# EAGLE board RFID Reader PCB (EAGLE 5.02)
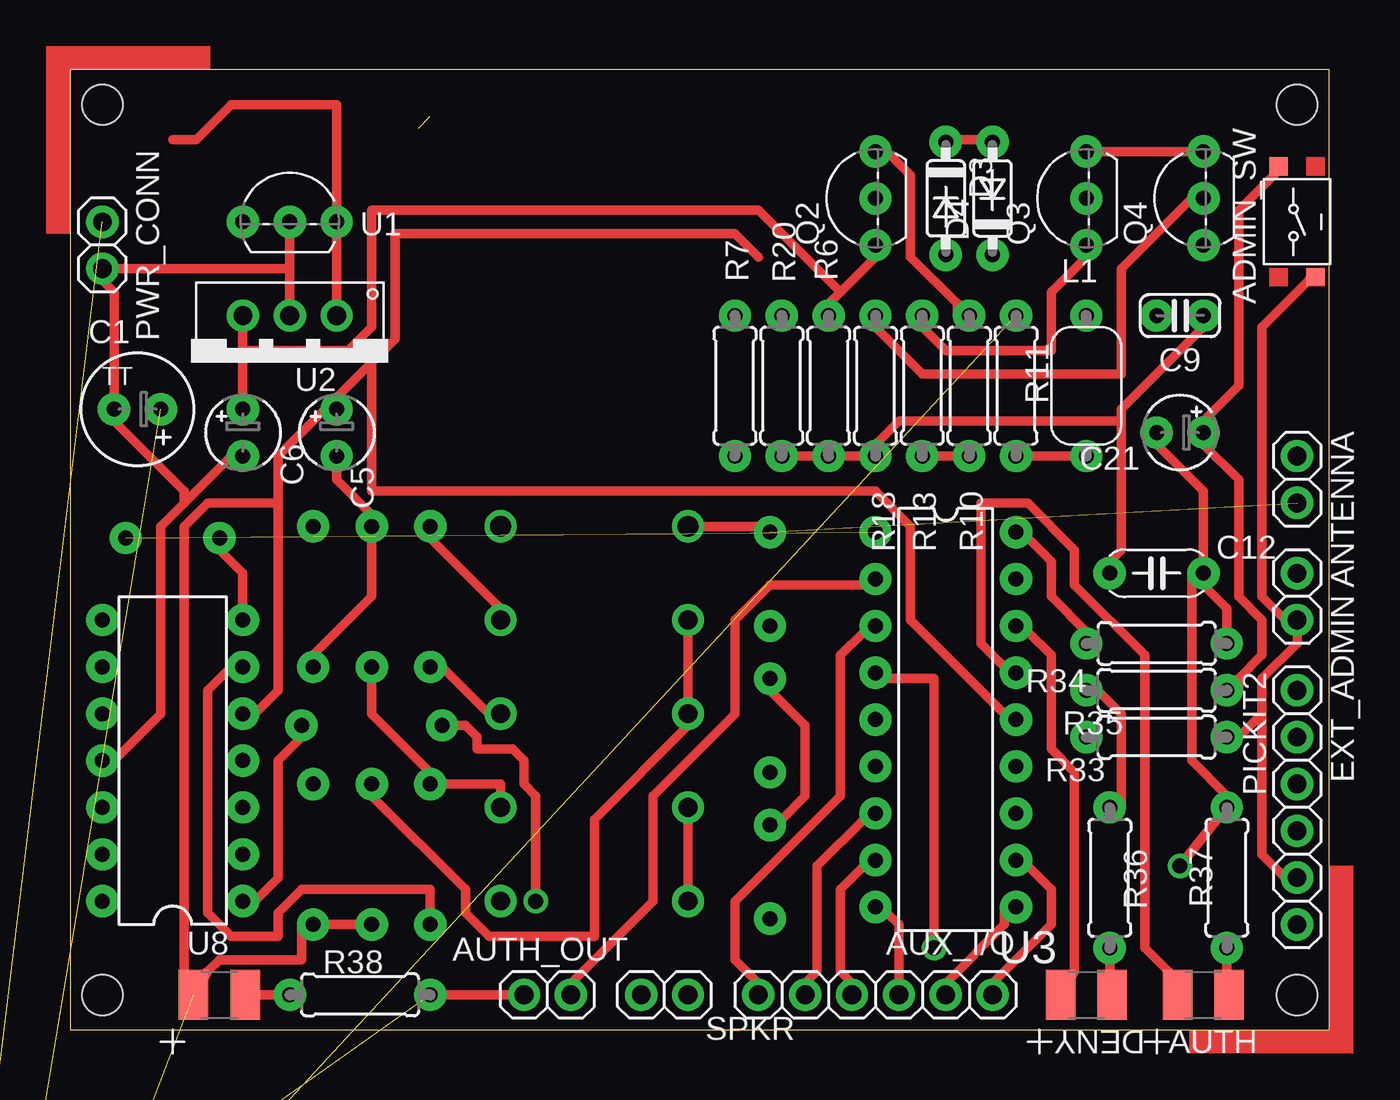
[diagram p0: board, top side]
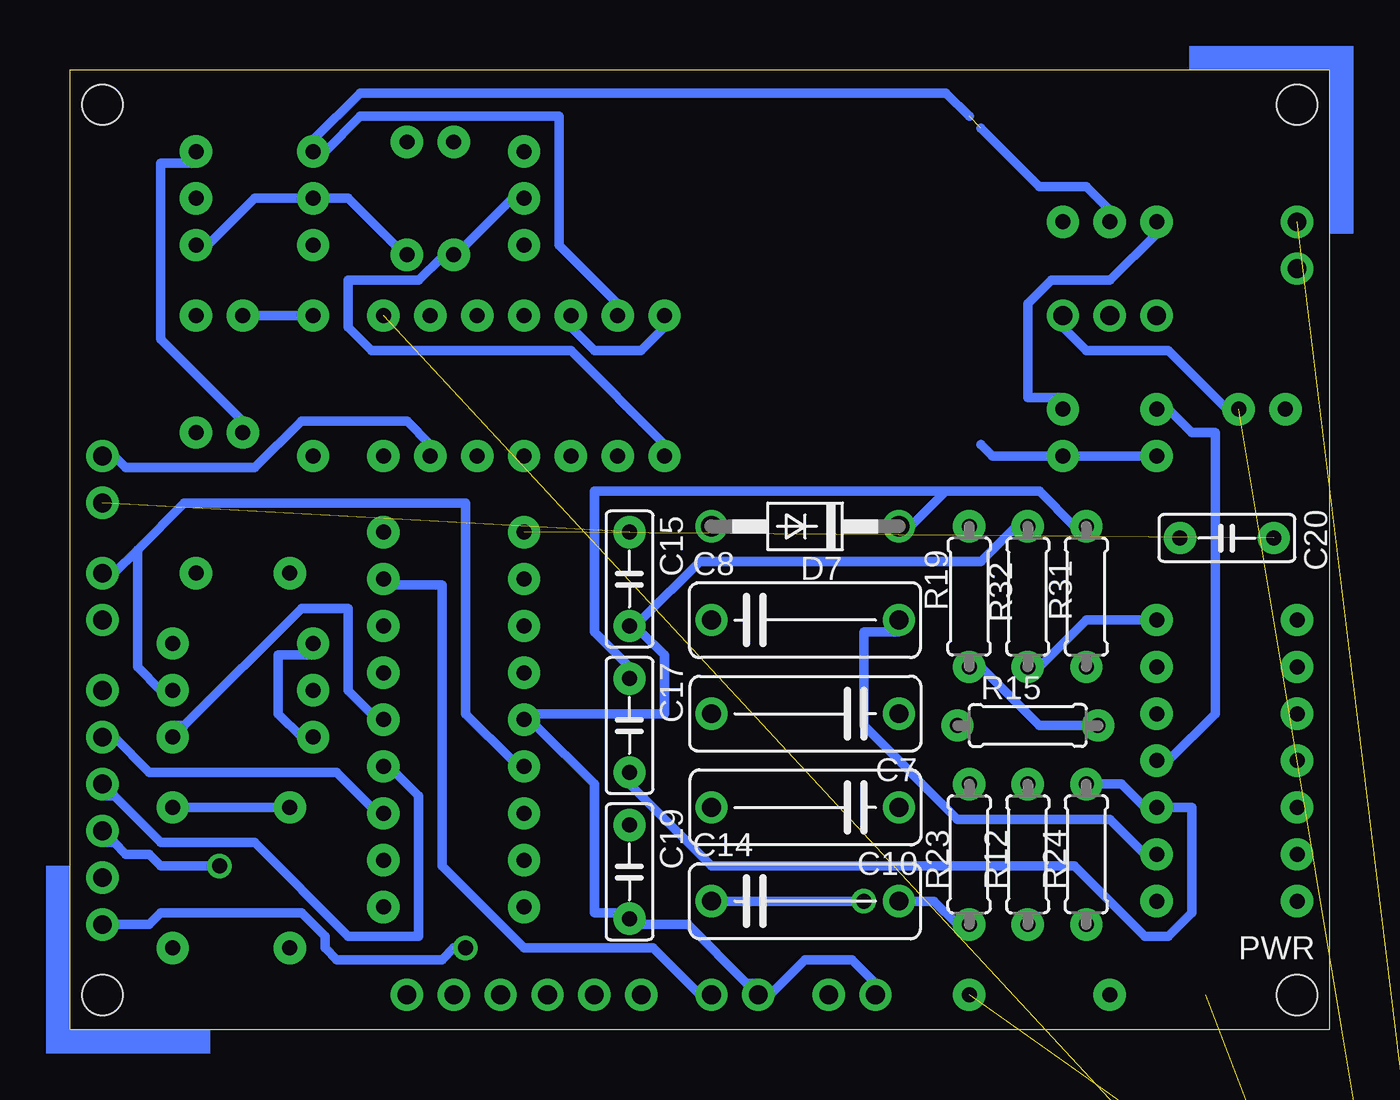
[diagram p1: board, bottom side, seen from below]

Size 68.25 x 52.06 mm. Coordinates in mm from the lower left corner, seen from the top.
Outline: 0,0 68.25,0 68.25,52.06 0,52.06 0,0
Copper layers (1*16): Top 0.035mm / dielectric 1.5mm / Bottom 0.035mm
Design rules "etched pcb *": minimum track width 10mil, minimum drill 32mil, track to track 10mil, track to pad 10mil, pad to pad 10mil, via to via 10mil, smd to smd 8mil, copper to edge 5mil, drill to drill 10mil, minimum pad ring 10mil, minimum via ring 10mil, stop-mask expansion 4mil, vias tented up to drill 0mil, thermal gap 10mil
Net classes: 0 default: width 0.508 mm
Holes 2.2 mm at 1.74,50.16 66.51,50.16 66.51,1.9 1.74,1.9

## Footprints (pad centres in the part's own frame; a part is rotated, then mirrored left to right if it is on the bottom)
PUSH_SW = smd 1 x 1: 1 -3,-1; 2 3,1
1X02 = drill 1.016 pad 1.75 round: 1 -1.27,0; 2 1.27,0
C1210 = smd 1.6 x 2.7: A -1.4,0; C 1.4,0
1X06 = drill 1.016 pad 1.75 round: 1 -6.35,0; 2 -3.81,0; 3 -1.27,0; 4 1.27,0; 5 3.81,0; 6 6.35,0
TT2D6 = drill 0.813 pad 1.75 round: + -1.27,0; - 1.27,0
TT2D4 = drill 0.813 pad 1.75 round: + -1.27,0; - 1.27,0
C102-040X125 = drill 1.016 pad 1.75 round: 1 -5.08,0; 2 5.08,0
C025-024X044 = drill 0.813 pad 1.75 round: 1 -1.27,0; 2 1.27,0
C050-025X050 = drill 0.813 pad 1.75 round: 1 -2.54,0; 2 2.54,0
C050-025X075 = drill 0.813 pad 1.75 round: 1 -2.54,0; 2 2.54,0
DO35-4 = drill 0.813 pad 1.75 round: A 3.06,0; C -3.06,0
DO41-10 = drill 1.118 pad 1.75 round: A 5.08,0; C -5.08,0
0208/7 = drill 0.813 pad 1.75 round: 1 -3.81,0; 2 3.81,0
TO92-CBE = drill 0.813 pad 1.75 round: B 0,0; C -2.54,0; E 2.54,0
TO92-EBC = drill 0.813 pad 1.75 round: B 0,-1.27; C 2.54,-1.27; E -2.54,-1.27
0207/7 = drill 0.813 pad 1.75 round: 1 -3.81,0; 2 3.81,0
TO92- = drill 0.813 pad 1.75 round: 1 2.54,0; 2 0,0; 3 -2.54,0
TO220V = drill 1.016 pad 1.75 round: 1 -2.54,-2.54; 2 0,-2.54; 3 2.54,-2.54
DIL18 = drill 0.813 pad 1.75 round: 1 -10.16,-3.81; 2 -7.62,-3.81; 3 -5.08,-3.81; 4 -2.54,-3.81; 5 0,-3.81; 6 2.54,-3.81; 7 5.08,-3.81; 8 7.62,-3.81; 9 10.16,-3.81; 10 10.16,3.81; 11 7.62,3.81; 12 5.08,3.81; 13 2.54,3.81; 14 0,3.81; 15 -2.54,3.81; 16 -5.08,3.81; 17 -7.62,3.81; 18 -10.16,3.81
DIL14 = drill 0.813 pad 1.75 round: 1 -7.62,-3.81; 2 -5.08,-3.81; 3 -2.54,-3.81; 4 0,-3.81; 5 2.54,-3.81; 6 5.08,-3.81; 7 7.62,-3.81; 8 7.62,3.81; 9 5.08,3.81; 10 2.54,3.81; 11 0,3.81; 12 -2.54,3.81; 13 -5.08,3.81; 14 -7.62,3.81
DIL08 = drill 0.813 pad 1.75 round: 1 -3.81,-3.81; 2 -1.27,-3.81; 3 1.27,-3.81; 4 3.81,-3.81; 5 3.81,3.81; 6 1.27,3.81; 7 -1.27,3.81; 8 -3.81,3.81

## Placement (x,y rotation side)
ADMIN_SW  SWITCH  [PUSH_SW]  66.51,43.81 270 top
ANTENNA  PINHD-1X2  [1X02]  66.51,29.84 270 top
AUTH  LED  [C1210]  61.43,1.9 0 top
AUTH_OUT  PINHD-1X2  [1X02]  25.87,1.9 180 top
AUX_I/O  PINHD-1X6  [1X06]  43.65,1.9 0 top
C1  100uF 25V  [TT2D6]  3.65,33.65 180 top
C5  10uF 16V  [TT2D4]  14.44,32.38 270 top
C6  10uF 16V  [TT2D4]  9.36,32.38 270 top
C7  1000pF  [C102-040X125]  28.41,17.14 180 bottom
C8  1000pF  [C102-040X125]  28.41,22.22 0 bottom
C9  1800pF  [C025-024X044]  60.16,38.73 0 top
C10  1000pF  [C102-040X125]  28.41,12.06 180 bottom
C12  6200pF  [C050-025X050]  58.89,24.76 0 top
C14  1000pF  [C102-040X125]  28.41,6.98 0 bottom
C15  1000pF  [C050-025X075]  37.94,24.44 270 bottom
C17  1000pF  [C050-025X075]  37.94,16.5 270 bottom
C19  .0022uF  [C050-025X075]  37.94,8.57 270 bottom
C20  1000pF  [C050-025X075]  5.55,26.67 180 bottom
C21  10uF 16V  [TT2D4]  60.16,32.38 180 top
D3  1N4148  [DO35-4]  47.46,45.08 270 top
D4  1N4148  [DO35-4]  50,45.08 90 top
D7  1N4936  [DO41-10]  28.41,27.3 180 bottom
DENY  LED  [C1210]  55.08,1.9 0 top
EXT_ADMIN  PINHD-1X2  [1X02]  66.51,23.49 270 top
EXT_PWR_SW  PINHD-1X2  [1X02]  -3.34,-8.26 0 top  (outside the outline)
L1  1000uH  [0208/7]  55.08,34.92 90 top
PICKIT2  PINHD-1X6  [1X06]  66.51,12.06 270 top
PWR  LED  [C1210]  8.09,1.9 0 top
PWR_CONN  PINHD-1X2  [1X02]  1.74,42.54 270 top
Q2  2N2222  [TO92-CBE]  43.65,45.08 90 top
Q3  2N2907  [TO92-EBC]  53.81,45.08 90 top
Q4  2N2907  [TO92-EBC]  60.16,45.08 90 top
R6  22k  [0207/7]  41.11,34.92 90 top
R7  470  [0207/7]  36.03,34.92 270 top
R10  10  [0207/7]  48.73,34.92 270 top
R11  82  [0207/7]  51.27,34.92 270 top
R12  1.82k  [0207/7]  16.34,9.52 270 bottom
R13  10  [0207/7]  46.19,34.92 90 top
R15  2.67k  [0207/7]  16.34,16.5 0 bottom
R18  100  [0207/7]  43.65,34.92 270 top
R19  47.5K  [0207/7]  19.52,23.49 90 bottom
R20  12k  [0207/7]  38.57,34.92 270 top
R23  82.5k  [0207/7]  19.52,9.52 270 bottom
R24  1M  [0207/7]  13.17,9.52 90 bottom
R31  390k  [0207/7]  13.17,23.49 270 bottom
R32  100k  [0207/7]  16.34,23.49 270 bottom
R33  10k  [0207/7]  58.89,15.87 0 top
R34  3.6k  [0207/7]  58.89,20.95 180 top
R35  4.7k  [0207/7]  58.89,18.41 0 top
R36  220  [0207/7]  56.35,8.25 270 top
R37  220  [0207/7]  62.7,8.25 270 top
R38  220  [0207/7]  15.71,1.9 180 top
SPKR  PINHD-1X2  [1X02]  32.22,1.9 180 top
U1  LM78L05ACZ  [TO92-]  11.9,43.81 0 top
U2  LM78M12CT  [TO220V]  11.9,36.19 180 top
U3  PIC16F88  [DIL18]  47.46,16.82 270 top
U8  TL084P  [DIL14]  5.55,14.6 90 top
U9  PIC10F222  [DIL08]  -0.8,-17.15 0 top  (outside the outline)

## Library data of the parts
ADMIN_SW ANTENNA AUTH AUTH_OUT AUX_I/O C1 C5-C10 C12 C14 C15 C17 C19-C21 D3 D4 D7 DENY EXT_ADMIN EXT_PWR_SW L1 PICKIT2 PWR PWR_CONN Q2-Q4 R6 R7 R10-R13 R15 R18-R20 R23 R24 R31-R38 SPKR U1-U3 U8 U9 = RFID Reader Part Library

## Nets
+5V: ADMIN_SW.2 C5.+ EXT_ADMIN.2 PICKIT2.5 PWR.A R12.2 R24.1 R33.2 U1.3 U3.14 U8.5 U9.2
+12V: C6.+ Q2.C R6.2 R7.1 U2.3 U8.4
GND: AUTH_OUT.2 C1.- C5.- C6.- C12.2 C15.2 C19.2 C21.- PICKIT2.4 PWR_CONN.2 Q3.C Q4.C R20.1 R31.2 R32.1 R34.1 R35.1 R36.1 R37.1 R38.1 SPKR.2 U1.2 U2.2 U3.5 U8.11 U9.7
N$1: R11.1 U9.5
N$2: EXT_PWR_SW.1 PWR_CONN.1
N$5: L1.1 R11.2
N$7: C9.1 L1.2
N$8: C9.2 C12.1 R6.1 R18.2 R20.2
N$9: ANTENNA.2 C15.1 D7.A
N$10: Q2.E R10.1
N$11: ANTENNA.1 R10.2 R13.1
N$12: Q3.E R13.2
N$13: D3.A Q2.B R7.2
N$14: D3.C D4.A
N$15: D4.C Q3.B Q4.E
N$16: Q4.B R18.1
N$17: C14.2 R23.2 U8.6
N$18: C17.1 C19.1 D7.C R31.1
N$19: DENY.C R36.2
N$20: C17.2 R24.2 U8.3
N$21: C10.2 C14.1 R15.1
N$22: C10.1 C20.2 R23.1 R32.2 U8.7
N$23: C8.2 R19.2 U8.2
N$24: C7.1 R15.2 R19.1 U8.1
N$25: C7.2 C8.1 R12.1
N$26: AUTH.C R37.2
N$27: AUTH.A U3.15
N$28: R33.1 R34.2 U3.18
N$29: PWR.C R38.2
N$30: DENY.A U3.16
N$31: PICKIT2.2 U3.12
N$32: ADMIN_SW.1 C21.+ EXT_ADMIN.1 R35.2 U3.6
N$33: PICKIT2.6 U3.4
N$34: PICKIT2.3 U3.13
N$35: AUX_I/O.1 U3.3
N$36: AUX_I/O.2 U3.7
N$37: AUX_I/O.3 U3.8
N$38: AUX_I/O.4 U3.9
N$39: AUX_I/O.5 U3.10
N$40: AUX_I/O.6 U3.11
N$41: C20.1 U3.1
N$43: SPKR.1 U3.17
N$44: AUTH_OUT.1 U3.2
SUPPLY: C1.+ EXT_PWR_SW.2 U1.1 U2.1

## Tracks (layer width: path | path; a pad name or v marks a point on that pad's centre or on a via)
+5V  (1 unrouted)
  Top 0.508: ADMIN_SW.2 67.14,40.63 64.61,38.09 64.61,23.49 65.88,22.22 EXT_ADMIN.2 66.51,20.95 64.61,19.04 64.61,17.14 | 64.61,17.14 63.34,15.87 R33.2 | 64.61,17.14 64.61,9.52 65.88,8.25 PICKIT2.5 | R12.2 R24.1 12.54,5.71 12.54,3.8 8.09,3.8 7.46,3.17 PWR.A 6.19,3.17 6.19,27.3 7.46,28.57 11.26,28.57 | 11.26,28.57 11.26,31.11 13.8,33.65 C5.+ 14.44,34.28 16.34,36.19 | 11.26,28.57 11.26,18.41 9.99,17.14 U8.5 | 37.3,41.91 36.03,43.17 17.61,43.17 17.61,37.46 16.34,36.19 | 16.34,36.19 16.34,29.21 43.65,29.21 45.55,27.3 45.55,22.22 50.64,17.14 U3.14
  Bottom 0.508: U3.14 51.91,17.14 53.18,18.41 53.18,22.86 55.72,22.86 62.07,16.5 62.7,16.5 R33.2 | U1.3 9.36,43.17 11.9,40.63 15.07,40.63 16.34,39.36 16.34,34.28 14.44,34.28 C5.+
+12V
  Top 0.508: 41.75,40 41.11,39.36 R6.2 | 41.75,40 43.65,41.91 Q2.C | 9.36,36.83 U2.3 | C6.+ 9.36,36.83 | 41.75,40 37.3,44.44 16.34,44.44 16.34,38.09 15.07,36.83 9.36,36.83
  Bottom 0.508: R7.1 36.03,38.09 37.3,36.83 39.84,36.83 41.11,38.09 R6.2 | U8.4 8.72,14.6 6.19,17.14 6.19,32.38 7.46,32.38 8.72,33.65 C6.+
GND  (via drill 0.81)  (2 unrouted)
  Top 0.508: R35.1 55.72,18.41 56.98,17.14 56.98,12.06 R36.1 | C12.2 61.43,24.13 62.7,22.86 R34.1 | C21.- 58.89,31.75 61.43,29.21 C12.2 | C12.2 60.8,24.76 60.8,14.6 62.7,12.7 R37.1 v60.16,8.89 | Q4.C Q3.C | AUTH_OUT.2 R38.1 | 11.9,41.27 U2.2 | 11.9,41.27 U1.2 | R31.2 13.17,20.32 16.34,23.49 R32.1 16.34,27.93 14.44,29.84 C5.- | 6.19,28.57 8.72,31.11 C6.- | 6.19,28.57 4.92,27.3 4.92,17.14 2.38,14.6 U8.11 | 6.19,28.57 6.19,29.21 2.38,33.02 C1.- 2.38,40 1.74,40.63 PWR_CONN.2 11.9,41.27
  Bottom 0.508: R36.1 R37.1 | R20.1 38.57,39.36 41.75,42.54 41.75,49.52 52.54,49.52 54.45,47.62 Q3.C 55.08,48.25 52.54,50.8 20.79,50.8 19.52,49.52 | C21.- 58.89,33.02 63.34,37.46 63.34,46.98 61.43,46.98 Q4.C | AUTH_OUT.2 24.6,2.54 25.87,3.8 28.41,3.8 30.31,1.9 SPKR.2 30.95,2.54 31.58,2.54 34.76,5.71 37.3,5.71 C19.2 38.57,6.35 39.84,6.35 39.84,13.33 43.02,16.5 U3.5 43.02,17.14 36.03,17.14 36.03,20.32 37.3,21.59 C15.2 37.3,22.22 34.12,25.39 18.88,25.39 16.98,27.3 R32.1 | 18.88,48.89 15.71,45.72 13.17,45.72 11.9,44.44 U1.2 | C6.- C5.- 18.25,31.11 18.88,31.75 | v60.16,8.89 63.34,8.89 63.97,9.52 65.24,9.52 65.88,10.16 66.51,10.16 PICKIT2.4
N$1  (1 unrouted)
N$2  (1 unrouted)
N$5
  Top 0.508: R11.2 L1.1
N$7
  Bottom 0.508: L1.2 C9.1
N$8
  Top 0.508: R20.2 R6.1 R18.2 43.65,31.75 44.92,33.02 56.98,33.02 | 56.98,33.02 56.98,33.65 61.43,38.09 C9.2 | 56.98,33.02 56.98,26.03 56.35,25.39 C12.1
N$9  (1 unrouted)
  Top 0.508: C15.1 37.3,27.3 D7.A
N$10
  Top 0.508: Q2.E 44.29,47.62 45.55,46.35 45.55,41.91 48.1,39.36 48.1,38.73 R10.1
N$11
  Top 0.508: R13.1 R10.2
  Bottom 0.508: ANTENNA.1 65.88,31.11 65.24,30.47 58.26,30.47 55.72,33.02 50,33.02 48.73,31.75 R10.2
N$12
  Top 0.508: R13.2 46.19,38.09 47.46,36.83 53.18,36.83 53.18,40 55.08,41.91 Q3.E
N$13
  Bottom 0.508: R7.2 36.03,31.75 41.11,36.83 51.91,36.83 53.18,38.09 53.18,40.63 49.37,40.63 48.1,41.91 D3.A 46.83,42.54 44.29,45.08 Q2.B
N$14
  Top 0.508: D3.C 48.1,48.25 49.37,48.25 D4.A
N$15
  Bottom 0.508: D4.C 50.64,42.54 53.18,45.08 Q3.B 58.26,45.08 60.8,42.54 Q4.E
N$16
  Top 0.508: R18.1 43.65,38.09 46.19,35.56 56.98,35.56 56.98,41.27 60.8,45.08 Q4.B
N$17
  Top 0.508: U8.6 8.72,19.68 7.46,18.41 7.46,6.35 8.72,5.07 11.26,5.07 11.26,6.35 12.54,7.61 19.52,7.61 R23.2
  Bottom 0.508: R23.2 20.15,5.71 21.43,6.98 C14.2
N$18
  Top 0.508: C19.1 38.57,11.43 39.84,12.7 39.84,16.5 37.94,18.41 C17.1
  Bottom 0.508: 20.79,29.21 15.71,29.21 13.8,27.3 R31.1 | 20.79,29.21 22.7,27.3 D7.C | 20.79,29.21 39.84,29.21 39.84,21.59 37.94,19.68 C17.1
N$19
  Top 0.508: DENY.C 56.35,3.17 R36.2
N$20
  Bottom 0.508: R24.2 11.26,13.33 9.99,12.06 U8.3 7.46,12.06 7.46,6.35 8.72,5.07 9.99,5.07 13.8,8.89 33.49,8.89 37.94,13.33 C17.2
N$21  (via drill 0.81)
  Top 0.508: C14.1 C10.2 | v25.23,6.98 25.23,12.7 24.6,13.33 24.6,14.6 23.96,15.24 22.06,15.24 22.06,15.87 21.43,16.5 R15.1
  Bottom 0.508: v25.23,6.98 C14.1
N$22
  Top 0.508: C10.1 23.33,13.33 R23.1 19.52,13.96 16.34,17.14 R32.2 | C20.2 8.09,26.03 9.36,24.76 U8.7
  Bottom 0.508: R32.2 15.71,19.68 13.17,22.22 U8.7
N$23
  Top 0.508: R19.2 19.52,26.67 23.33,22.86 C8.2
  Bottom 0.508: U8.2 9.99,9.52 11.9,11.43 20.15,11.43 25.23,16.5 25.23,21.59 23.33,21.59 C8.2
N$24
  Top 0.508: R19.1 20.15,19.68 22.7,17.14 C7.1 | U8.1 9.99,6.98 11.26,8.25 11.26,14.6 12.54,15.87 R15.2
  Bottom 0.508: R19.1 18.88,19.68 15.71,16.5 R15.2
N$25
  Top 0.508: R12.1 16.34,12.7 21.43,7.61 21.43,6.35 22.7,5.07 28.41,5.07 28.41,11.43 33.49,16.5 C7.2 C8.1
N$26
  Top 0.508: AUTH.C 62.7,3.17 R37.2
N$27
  Top 0.508: AUTH.A 59.53,3.17 58.26,4.44 58.26,20.32 54.45,24.13 54.45,26.03 51.91,28.57 49.37,28.57 49.37,20.95 50.64,19.68 U3.15
N$28
  Top 0.508: U3.18 51.91,26.67 53.18,25.39 53.18,23.49 55.08,21.59 R34.2
  Bottom 0.508: R33.1 55.72,15.87 56.98,17.14 56.98,20.32 55.08,20.32 R34.2
N$29
  Top 0.508: PWR.C R38.2
N$30
  Top 0.508: DENY.A 54.45,3.17 54.45,13.96 53.18,15.24 53.18,20.32 51.91,21.59 U3.16
N$31
  Bottom 0.508: U3.12 51.91,12.06 53.81,13.96 63.97,13.96 65.88,15.87 PICKIT2.2
N$32
  Top 0.508: ADMIN_SW.1 65.24,46.35 63.34,44.44 63.34,34.92 61.43,33.02 C21.+ 61.43,31.75 63.34,29.84 63.34,23.49 64.61,22.22 64.61,20.32 63.34,19.04 63.34,18.41 R35.2
  Bottom 0.508: 64.61,26.03 65.88,24.76 EXT_ADMIN.1 | 64.61,26.03 62.07,28.57 46.83,28.57 46.83,17.14 44.29,14.6 U3.6 | 64.61,26.03 64.61,19.68 63.34,18.41 R35.2
N$33  (via drill 0.81)
  Top 0.508: v46.83,4.44 46.83,19.04 44.29,19.04 U3.4
  Bottom 0.508: v46.83,4.44 47.46,4.44 48.1,3.8 53.81,3.8 54.45,4.44 54.45,5.07 55.72,6.35 63.34,6.35 63.97,5.71 PICKIT2.6
N$34
  Bottom 0.508: U3.13 50.64,13.96 49.37,12.7 49.37,5.07 53.18,5.07 58.26,10.16 63.34,10.16 65.88,12.7 66.51,12.7 PICKIT2.3
N$35
  Top 0.508: AUX_I/O.1 37.3,2.54 36.03,3.8 36.03,6.98 41.75,12.7 41.75,20.32 43.02,21.59 U3.3
N$36
  Top 0.508: AUX_I/O.2 39.84,2.54 40.48,3.17 40.48,8.89 43.02,11.43 U3.7
N$37
  Top 0.508: AUX_I/O.3 42.38,2.54 41.75,3.17 41.75,7.61 43.02,8.89 U3.8
N$38
  Top 0.508: U3.9 44.29,6.35 44.92,5.71 AUX_I/O.4
N$39
  Top 0.508: AUX_I/O.5 47.46,2.54 50.64,5.71 50.64,6.35 U3.10
N$40
  Top 0.508: AUX_I/O.6 50,2.54 53.18,5.71 53.18,7.61 51.91,8.89 U3.11
N$41  (1 unrouted)
N$43
  Bottom 0.508: SPKR.1 34.12,1.9 36.67,4.44 43.65,4.44 48.1,8.89 48.1,24.13 50.64,24.13 U3.17
N$44
  Top 0.508: AUTH_OUT.1 27.14,2.54 31.58,6.98 31.58,12.7 36.03,17.14 36.03,22.22 37.94,24.13 43.02,24.13 U3.2
SUPPLY  (1 unrouted)
  Top 0.508: 5.55,48.25 6.82,48.25 8.72,50.16 14.44,50.16 U1.1 U2.1
  Bottom 0.508: C1.+ 5.55,33.65 8.72,36.83 13.17,36.83 14.44,38.09 U2.1
(copper drawn outside any net)
  shapes: Bottom area x4, Top area x4